# Altium PCB PCB_BanTay_v1-copy_2025-10-16.pcbdoc (part 1 of 2)
Units mm, origin at the board's own origin, x right, y up, seen from the top; angles counter-clockwise.
Board outline 154.82 x 105.03 mm, 2 copper layers (Top Layer, Bottom Layer); 136 components, 142 nets, 546 pads, 572 vias.
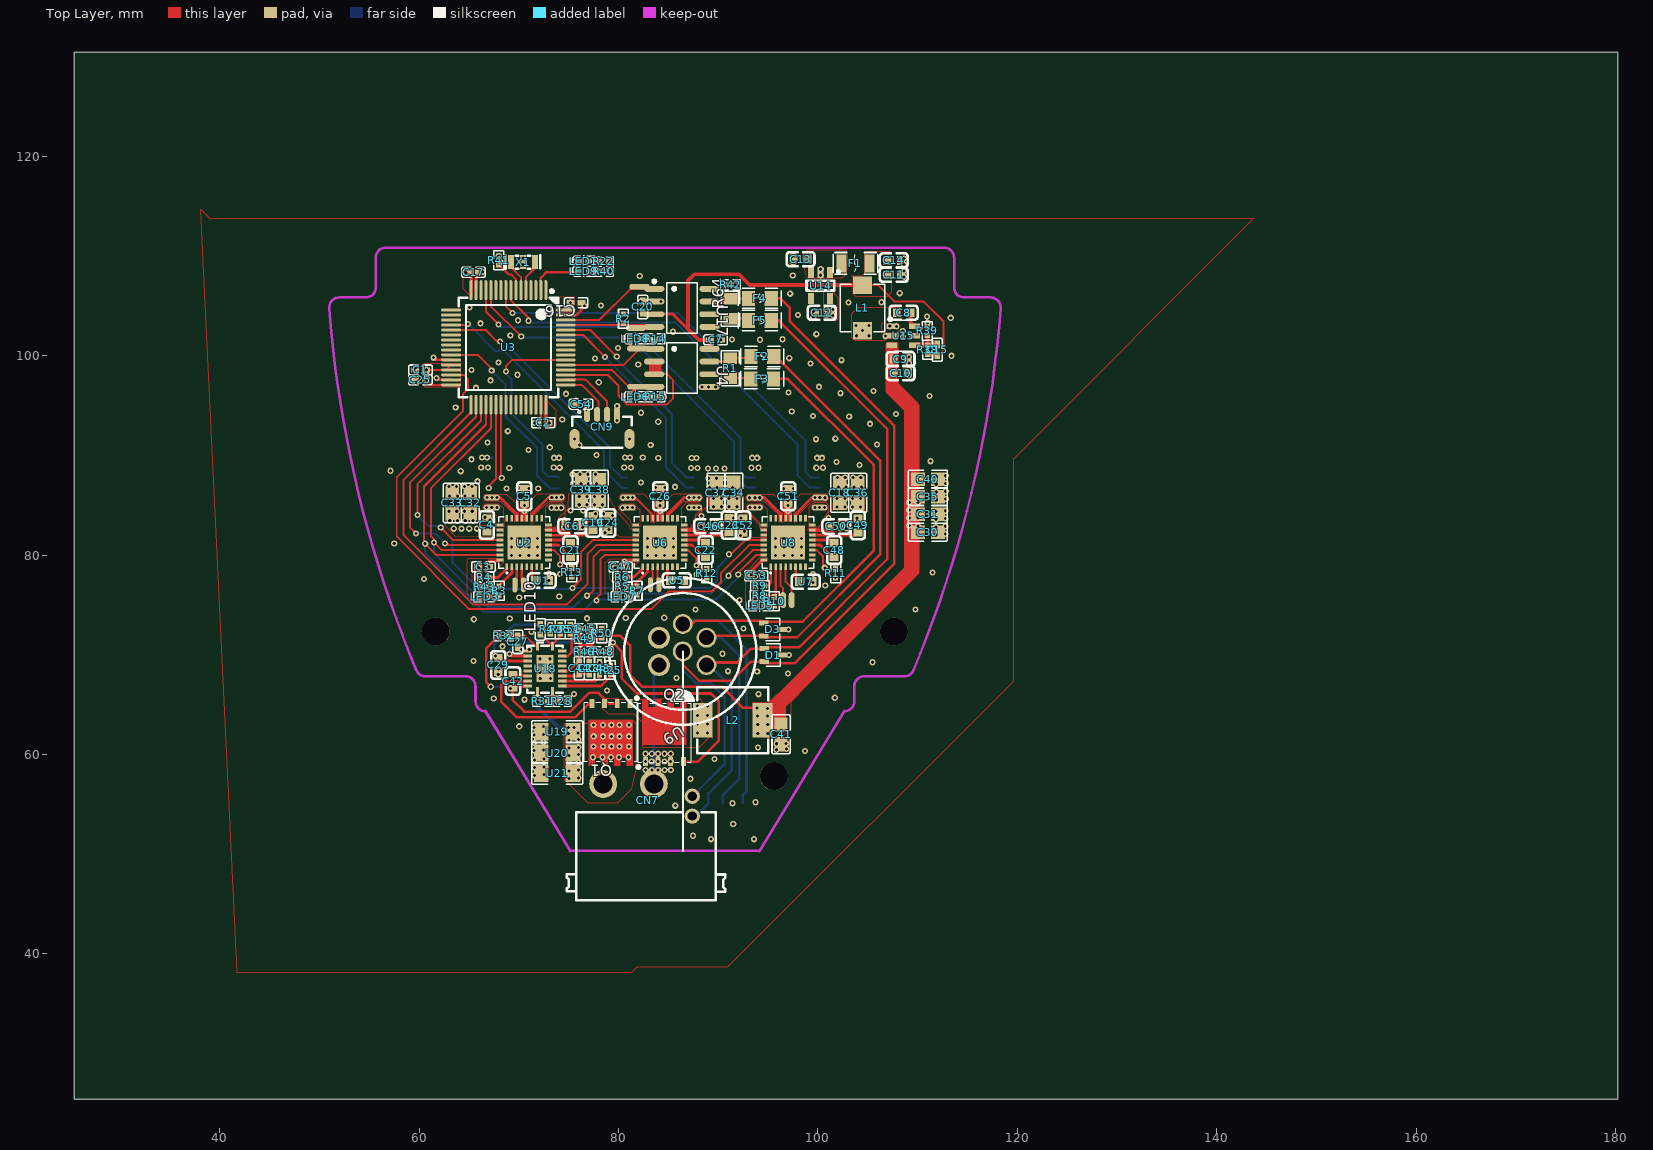
[diagram p0: Top Layer view]
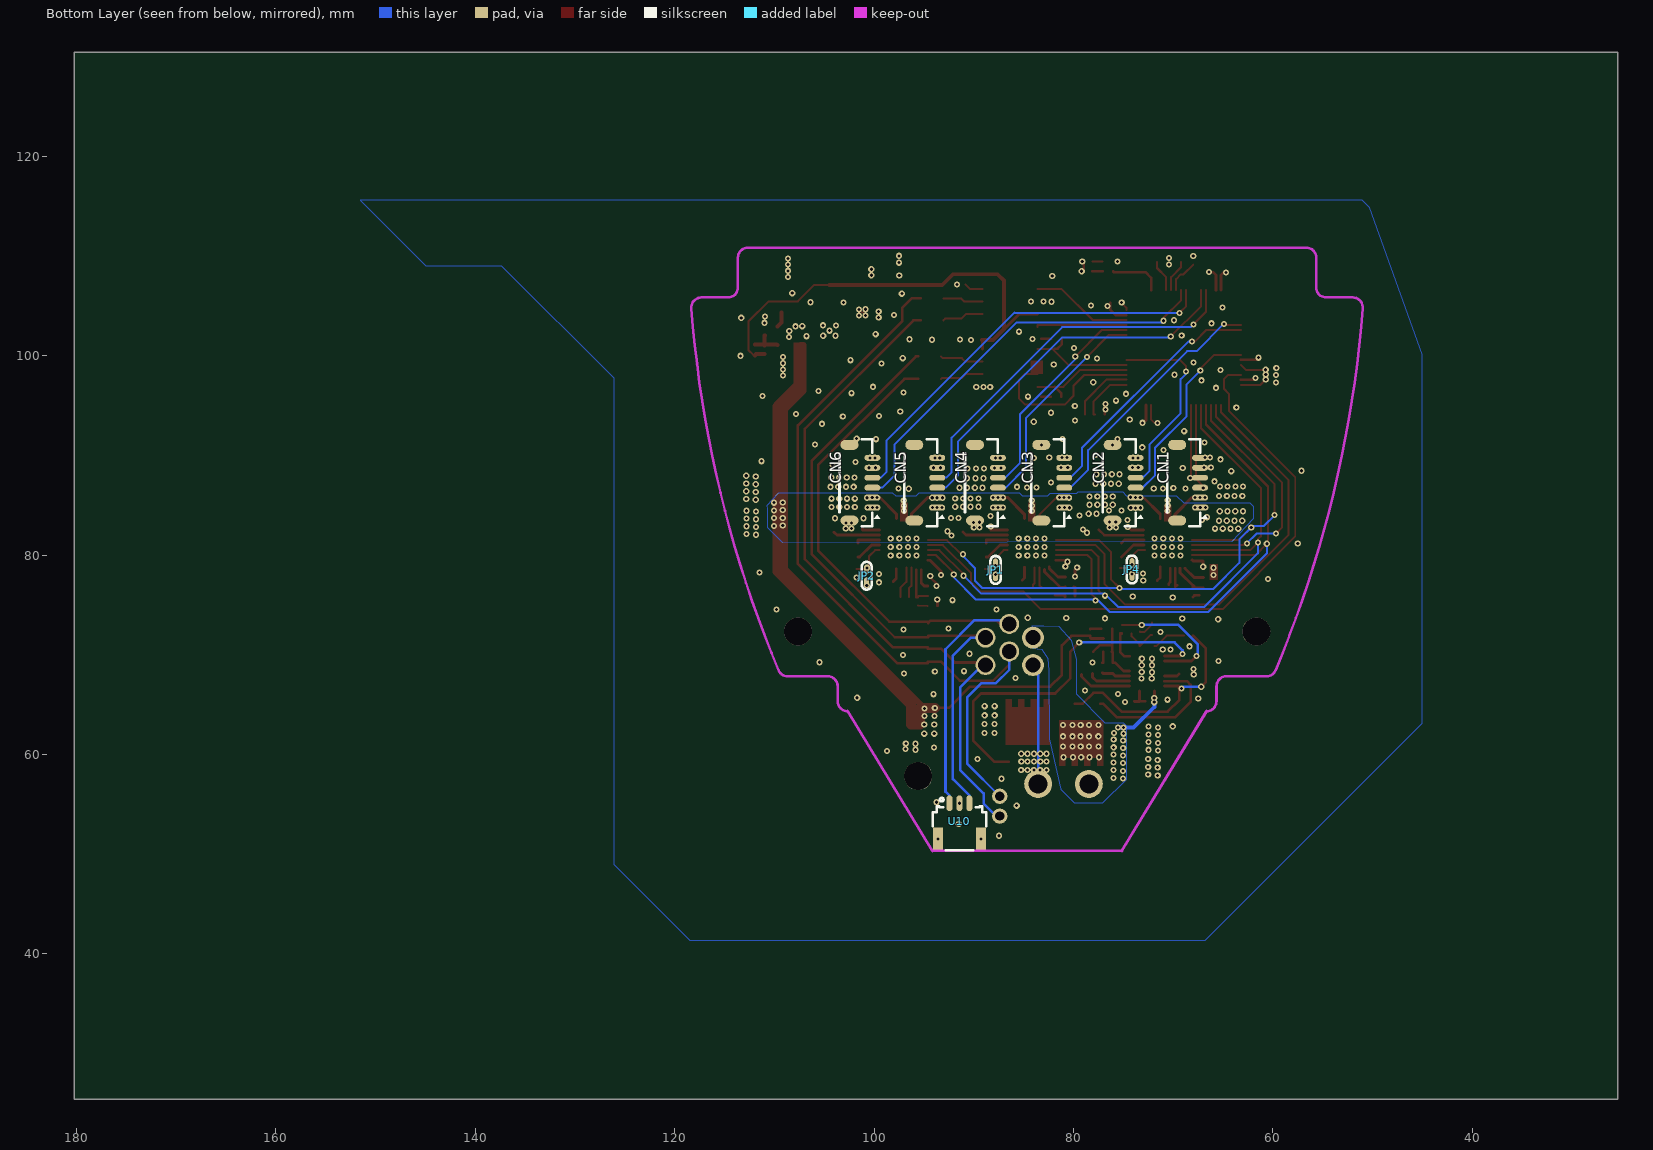
[diagram p1: Bottom Layer view, seen from below]

## Layer stack, top to bottom
Top Layer: signal copper (thickness not stored)
Dielectric: dielectric 0.32, FR-4, Dk 4.8
Bottom Layer: signal copper (thickness not stored)

## Board outline
180.218,25.4 25.4,25.4 25.4,130.43 180.218,130.43

## Components (designator, comment, footprint, x,y, rotation, side; value= is the part's Value field where it differs from the comment)
C1 "100nF" C0402 60.13,98.56 r0 top
C2 "100nF" C0402 72.44,93.28 r0 top
C3 "100nF" C0402 66.44,78.82 r0 top
C4 "220nF" C0603#1 66.78,83.02 r270 top
C5 "220nF" C0603#2 70.54,85.9 r90 top
C6 "220nF" C0603#2 75.35,82.9 r180 top
C7 "100nF" C0402 89.73,101.57 r0 top
C8 "100nF" C0603#2 108.6,104.3 r180 top
C9 "10uF" C0603#2 108.29,99.65 r180 top
C10 "100nF" C0603#2 108.29,98.25 r180 top
C11 "10uF" C0603#2 107.6,108.11 r180 top
C12 "1uF" C0603#2 100.38,104.3 r0 top
C13 "1uF" C0603#2 98.26,109.67 r0 top
C14 "10uF" C0603#2 107.6,109.55 r180 top
C15 "75pF" C0402 111.95,100.58 r270 top
C16 "100nF" C0402 75.74,105.3 r180 top
C17 "100nF" C0402 65.45,108.37 r180 top
C18 "10uF" C0805 102.194,86.23 r270 top
C19 "1uF" C0603#2 77.44,83.23 r90 top
C20 "100nF" C0402 82.41,104.88 r90 top
C21 "22nF" C0603#2 75.18,80.5 r270 top
C22 "22nF" C0603#2 88.74,80.5 r270 top
C23 "1uF" C0603#2 91.07,83 r90 top
C24 "220nF" C0603#2 78.95,83.22 r90 top
C25 "1uF" C0402 60.12,97.58 r0 top
C26 "220nF" C0603#2 84.17,85.9 r90 top
C27 "12pF" C0402 69.9,71.29 r270 top
C28 "3.9nF" C0402 77.07,68.64 r90 top
C29 "2.2uF" C0603#2 67.93,68.97 r90 top
C30 "10uF" C0805 111.02,82.291 r180 top
C31 "10uF" C0805 111.02,84.067 r180 top
C32 "10uF" C0805 65.1,85.22 r270 top
C33 "10uF" C0805 63.324,85.22 r270 top
C34 "10uF" C0805 91.56,86.26 r270 top
C35 "10uF" C0805 111.02,85.844 r180 top
C36 "10uF" C0805 103.97,86.23 r270 top
C37 "10uF" C0805 89.784,86.26 r270 top
C38 "10uF" C0805 78.056,86.54 r270 top
C39 "10uF" C0805 76.28,86.54 r270 top
C40 "10uF" C0805 111.02,87.62 r180 top
C41 "47uF" C0805 96.29,62.02 r90 top
C42 "100nF" C0603#3 69.41,67.36 r90 top
C43 "1uF" C0402 78.09,68.65 r90 top
C44 "330pF" C0402 76.06,68.66 r90 top
C45 "470pF" C0402 76.66,72.6 r0 top
C46 "220nF" C0603#2 88.99,82.87 r180 top
C47 "100nF" C0402 80.21,78.8 r0 top
C48 "22nF" C0603#2 101.62,80.49 r270 top
C49 "1uF" C0603#2 104,82.98 r90 top
C50 "220nF" C0603#2 101.84,82.86 r180 top
C51 "220nF" C0603#2 97.008,85.9 r90 top
C52 "220nF" C0603#2 92.48,82.98 r90 top
C53 "100nF" C0402 93.81,77.91 r180 top
C54 "100nF" C0402 76.24,95.14 r0 top
CN1 "XY-SH1.0-6A51" CONN-SMD_6P-P1.00_XY-SH1.0-6A51 68.443,87.25 r270 bottom
CN2 "XY-SH1.0-6A51" CONN-SMD_6P-P1.00_XY-SH1.0-6A51 74.92,87.25 r270 bottom
CN3 "XY-SH1.0-6A51" CONN-SMD_6P-P1.00_XY-SH1.0-6A51 82.067,87.25 r270 bottom
CN4 "XY-SH1.0-6A51" CONN-SMD_6P-P1.00_XY-SH1.0-6A51 88.72,87.25 r270 bottom
CN5 "XY-SH1.0-6A51" CONN-SMD_6P-P1.00_XY-SH1.0-6A51 94.81,87.25 r270 bottom
CN6 "XY-SH1.0-6A51" CONN-SMD_6P-P1.00_XY-SH1.0-6A51 101.31,87.25 r270 bottom
CN7 "XT30PW(2+2)-M艾迈斯,颜色:黑色,90°焊板,弯针" CONN-TH_4P-XT30PW-M 82.92,55.42 r0 top
CN9 "1.0-4P LT" CONN-SMD_4P-P1.00_SHOU-HAN_1.0-4P-LT 78.34,92.87 r0 top
D1 "TPD2E007DCKR" SOT-323-3_L2.0-W1.3-P1.30-LS2.1-BR 95.5,69.96 r180 top
D3 "TPD2E007DCKR" SOT-323-3_L2.0-W1.3-P1.30-LS2.1-BR 95.47,72.53 r180 top
F1 "1206L016/48NR" FUSE-SMD_1206L016-48NR 103.75,109.25 r180 top
F2 "PPTCSMD0805-200/122A12V" F0805 94.43,99.92 r0 top
F3 "PPTCSMD0805-200/122A12V" F0805 94.4,97.67 r0 top
F4 "PPTCSMD0805-200/122A12V" F0805 94.18,105.75 r0 top
F5 "PPTCSMD0805-200/122A12V" F0805 94.18,103.53 r0 top
JP1 "SB" "SOLDER BRIDGE FOOTPRINT" 87.81,78.51 r90 bottom
JP2 "SB" "SOLDER BRIDGE FOOTPRINT" 100.74,77.92 r90 bottom
JP4 "SB" "SOLDER BRIDGE FOOTPRINT" 74.13,78.55 r90 bottom
L1 "10uH" IND-SMD_L4.5-W4.5_SMMS0420 104.46,104.78 r270 top
L2 "4.7uH" IND-SMD_L7.1-W6.6_SL0650 91.44,63.43 r0 top
LED1 "TZ-P2-0402RTIA1-0.45T" LED0402-RD_RED 76.51,109.48 r0 top
LED3 "TZ-P2-0402RTIA1-0.45T" LED0402-RD_RED 66.56,75.82 r180 top
LED5 "TZ-P2-0402RTIA1-0.45T" LED0402-RD_RED 94.15,74.91 r180 top
LED6 "TZ-P2-0402YGTIA1-0.45T" LED0402-RD_GREEN 81.69,95.87 r0 top
LED7 "TZ-P2-0402RTIA1-0.45T" LED0402-RD_RED 80.33,75.82 r180 top
LED8 "TZ-P2-0402 0TIA1-0.45T" LED0402-RD_ORANGE 81.69,101.68 r0 top
LED9 "SZYY0402B" LED0402-RD_BLUE 76.5,108.47 r0 top
LED10 "TZ-P2-0402RTIA1-0.45T" LED0402-RD_RED 72.14,72.54 r90 top
Q1 "BSC070N10NS5(ES)" TDSON-8_L5.9-W5.2-P1.27-BL-1 79.23,63.33 r180 top
Q2 "BSC070N10NS5(ES)" TDSON-8_L5.9-W5.2-P1.27-BL-1 84.59,61.06 r0 top
R1 "120Ω" R0805 91.19,98.74 r90 top
R2 "10kΩ" R0402 80.49,103.71 r270 top
R3 "1kΩ" R0402 68.01,76.43 r90 top
R4 "12kΩ" R0402 66.52,77.75 r0 top
R5 "10kΩ" R0402 80.39,76.81 r180 top
R6 "12kΩ" R0402 80.37,77.79 r0 top
R7 "1kΩ" R0402 81.85,76.43 r90 top
R8 "10kΩ" R0402 94.16,75.9 r180 top
R9 "12kΩ" R0402 94.18,76.9 r0 top
R10 "1kΩ" R0402 95.61,75.36 r90 top
R11 "10kΩ" R0402 101.76,78.17 r270 top
R12 "10kΩ" R0402 88.85,78.17 r270 top
R13 "10kΩ" R0402 75.31,78.26 r270 top
R14 "1kΩ" R0402 83.67,101.67 r0 top
R15 "1kΩ" R0402 83.67,95.87 r0 top
R22 "1kΩ" R0402 78.52,109.44 r180 top
R25 "33kΩ" R0402 79.19,68.46 r270 top
R28 "12.4kΩ" R0402 74.32,65.31 r180 top
R31 "49.9kΩ" R0402 72.35,65.31 r180 top
R32 "392Ω" R0402 68.48,71.92 r180 top
R35 "20kΩ" R0402 74.15,72.55 r90 top
R38 "100kΩ" R0402 110.99,100.58 r270 top
R39 "13.7kΩ" R0402 110.95,102.47 r270 top
R40 "1kΩ" R0402 78.52,108.45 r0 top
R41 "10kΩ" R0402 67.98,109.55 r90 top
R42 "4.7kΩ" R0402 91.24,107.12 r180 top
R43 "10kΩ" R0402 66.55,76.81 r180 top
R46 "3.57kΩ" R0402 76.57,70.3 r0 top
R47 "2.2kΩ" R0402 73.15,72.56 r270 top
R48 "3.09kΩ" R0402 78.45,70.3 r180 top
R49 "24kΩ" R0402 76.54,71.63 r0 top
R50 "47.5Ω" R0402 78.31,72.15 r270 top
R51 "1kΩ" R0402 75.15,72.56 r270 top
R64 "120Ω" R0805 91.23,104.71 r90 top
U1 "2.2uF" C0603#2 72.3,77.441 r0 top
U2 "MAX22216ATJY+_C20416745" QFN-32_L5.0-W5.0-P0.50-TL-EP3.4 70.54,81.25 r90 top
U3 "STM32G474RET6" LQFP-64_L10.0-W10.0-P0.50-LS12.0-BL 68.95,100.82 r180 top
U4 "MAX485CSA+T" SOIC-8_L4.9-W3.9-P1.27-LS6.0-BL 86.35,98.77 r270 top
U5 "2.2uF" C0603#2 85.84,77.46 r0 top
U6 "MAX22216ATJY+_C20416745" QFN-32_L5.0-W5.0-P0.50-TL-EP3.4 84.17,81.25 r90 top
U7 "2.2uF" C0603#2 98.77,77.33 r0 top
U8 "MAX22216ATJY+_C20416745" QFN-32_L5.0-W5.0-P0.50-TL-EP3.4 97.008,81.25 r90 top
U9 "KH-GX12-6P" CONN-TH_GX12-6P 86.436,71.021 r180 top
U10 "HX 1.0-3P WTDK" CONN-SMD_3P-P1.00_HANXIA_HX-1.0-3P-WTDK 91.43,53.3 r0 bottom
U14 "AP2112K-3.3TRG1" SOT-25-5_L2.9-W1.6-P0.95-LS2.8-BL 100.26,107.03 r180 top
U15 "TPS54302DDCR" SOT-23-6_L2.9-W1.6-P0.95-LS2.8-BL 108.54,101.99 r270 top
U17 "TJA1051T/1J" SOIC-8_L4.9-W3.9-P1.27-LS6.0-BL 86.35,104.79 r270 top
U18 "LM5146RGYR" VQFN-20_L4.5-W3.5-P0.50-BL-EP 72.62,68.61 r90 top
U19 "4.7uF" C1206 73.84,62.27 r0 top
U20 "4.7uF" C1206 73.84,60.14 r0 top
U21 "4.7uF" C1206 73.84,58.09 r0 top
X1 "8MHz" OSC-SMD_3P-L3.2-W1.3-P1.20-L 70.42,109.38 r0 top

## Footprints (in the part's own frame and the unit in brackets; to place one, negate y for a bottom-side part, rotate by r counter-clockwise, add the part's x,y. Pads: shape width x height; smd on the part's side, far side on the other; paste and mask are expansions set on the pad)
C0402 [mm]
  rect 0.79x0.54 smd paste-100 mask+0.051: 1(-0.545,0) 2(0.545,0)
  silkscreen extent -1.17,-0.5 1.17,0.5
C0603#1 [mm]
  rect 0.7x0.9 smd paste+0 mask+0.051: 1(-0.7,0) 2(0.7,0)
  silkscreen extent -1.39,-0.71 1.39,0.71
C0603#2 [mm]
  rect 0.8x0.9 smd paste+0 mask+0.051: 1(-0.7,0) 2(0.7,0)
  silkscreen extent -1.39,-0.71 1.39,0.71
C0603#3 [mm]
  rect 0.65x0.9 smd paste+0 mask+0.051: 1(-0.7,0) 2(0.7,0)
  silkscreen extent -1.39,-0.71 1.39,0.71
C0805 [mm]
  rect 1.41x1.35 smd paste-100 mask+0.051: 1(-1,0) 2(1,0)
  silkscreen extent -1.96,-0.9 1.96,0.9
C1206 [mm]
  rect 1.485x1.728 smd paste-100 mask+0.051: 1(-1.593,0) 2(1.593,0)
  silkscreen extent -2.56,-1.09 2.56,1.09
CONN-SMD_3P-P1.00_HANXIA_HX-1.0-3P-WTDK [mm]
  oval 0.6x1.6 smd paste+0 mask+0.051: 1(1,-1.8) 2(0,-1.8) 3(-1,-1.8)
  rect 1x2.3 smd paste+0 mask+0.051: 4(-2.15,1.8) 5(2.15,1.8)
  silkscreen extent -2.67,-2.34 2.67,2.92
CONN-SMD_4P-P1.00_SHOU-HAN_1.0-4P-LT [mm]
  oval 0.6x1.5 smd paste+0 mask+0.05: 1(-1.5,1.225) 2(-0.5,1.225) 3(0.5,1.225) 4(1.5,1.225)
  oval 1x2 smd paste+0 mask+0.05: 5(2.75,-1.225) 6(-2.75,-1.225)
  silkscreen extent -3,-2.12 3,1.62
CONN-SMD_6P-P1.00_XY-SH1.0-6A51 [mm]
  oval 0.6x1.6 smd paste+0 mask+0.05: 1(2.5,1.15) 2(1.5,1.15) 3(0.5,1.15) 4(-0.5,1.15) 5(-1.5,1.15) 6(-2.5,1.15)
  oval 1x1.8 smd paste+0 mask+0.05: 7(-3.8,-1.15) 8(3.8,-1.15)
  silkscreen extent -4.35,-2.15 4.35,1.91
CONN-TH_4P-XT30PW-M [mil]
  round 110.24 hole 74.8 paste+0 mask+1.97: 1(-175.78,63.59) 2(24.21,63.59)
  round 60 hole 36 paste+0 mask+1.97: 3(175.79,15.16) 4(175.79,-63.58)
  silkscreen extent -319,-395 305,-49
CONN-TH_GX12-6P [mm]
  round 2.2 hole 1.5 paste+0 mask+0.05: 1(2.382,2.063) 2(2.381,-0.687)
  round 2 hole 1.5 paste+0 mask+0.05: 3(0,-2.062) 4(-2.382,-0.687) 5(-2.382,2.062) 6(0,0.688)
  silkscreen extent -7.37,-6.67 7.37,8.05
F0805 [mm]
  rect 1.335x1.5 smd paste-100 mask+0.051: 1(-1.142,0) 2(1.142,0)
  silkscreen extent -2.16,-1.02 2.16,1.02
FUSE-SMD_1206L016-48NR [mm]
  rect 1x1.8 smd paste+0 mask+0.051: 1(-1.4,0) 2(1.4,0)
  silkscreen extent -2.22,-1.09 2.21,1.09
IND-SMD_L4.5-W4.5_SMMS0420 [mm]
  rect 1.724x1.92 smd paste+0 mask+0.051: 1(2.278,0) 2(-2.278,0)
  silkscreen extent -2.38,-2.23 2.38,2.23
IND-SMD_L7.1-W6.6_SL0650 [mm]
  rect 2x3.5 smd paste+0 mask+0.051: 1(-3,0) 2(2.999,0)
  silkscreen extent -3.55,-3.3 3.55,3.3
LED0402-RD_BLUE [mm]
  rect 0.636x0.54 smd paste-100 mask+0.051: 1(-0.538,0) 2(0.538,0)
  silkscreen extent -1.39,-0.54 1.09,0.54
LED0402-RD_GREEN [mm]
  rect 0.636x0.54 smd paste-100 mask+0.051: 1(-0.538,0) 2(0.538,0)
  silkscreen extent -1.39,-0.54 1.09,0.54
LED0402-RD_ORANGE [mm]
  rect 0.636x0.54 smd paste-100 mask+0.051: 1(-0.538,0) 2(0.538,0)
  silkscreen extent -1.39,-0.54 1.09,0.54
LED0402-RD_RED [mm]
  rect 0.636x0.54 smd paste-100 mask+0.051: 1(-0.508,0) 2(0.508,0)
  silkscreen extent -1.39,-0.54 1.09,0.54
LQFP-64_L10.0-W10.0-P0.50-LS12.0-BL [mm]
  oval 0.3x2 smd paste+0 mask+0.051: 1(-3.75,-5.75) 2(-3.25,-5.75) 3(-2.75,-5.75) 4(-2.25,-5.75) 5(-1.75,-5.75) 6(-1.25,-5.75) 7(-0.75,-5.75) 8(-0.25,-5.75) 9(0.25,-5.75) 10(0.75,-5.75) 11(1.25,-5.75) 12(1.75,-5.75) 13(2.25,-5.75) 14(2.75,-5.75) 15(3.25,-5.75) 16(3.75,-5.75) 33(3.75,5.75) 34(3.25,5.75) 35(2.75,5.75) 36(2.25,5.75) 37(1.75,5.75) 38(1.25,5.75) 39(0.75,5.75) 40(0.25,5.75) 41(-0.25,5.75) 42(-0.75,5.75) 43(-1.25,5.75) 44(-1.75,5.75) 45(-2.25,5.75) 46(-2.75,5.75) 47(-3.25,5.75) 48(-3.75,5.75)
  oval 2x0.3 smd paste+0 mask+0.051: 17(5.75,-3.75) 18(5.75,-3.25) 19(5.75,-2.75) 20(5.75,-2.25) 21(5.75,-1.75) 22(5.75,-1.25) 23(5.75,-0.75) 24(5.75,-0.25) 25(5.75,0.25) 26(5.75,0.75) 27(5.75,1.25) 28(5.75,1.75) 29(5.75,2.25) 30(5.75,2.75) 31(5.75,3.25) 32(5.75,3.75) 49(-5.75,3.75) 50(-5.75,3.25) 51(-5.75,2.75) 52(-5.75,2.25) 53(-5.75,1.75) 54(-5.75,1.25) 55(-5.75,0.75) 56(-5.75,0.25) 57(-5.75,-0.25) 58(-5.75,-0.75) 59(-5.75,-1.25) 60(-5.75,-1.75) 61(-5.75,-2.25) 62(-5.75,-2.75) 63(-5.75,-3.25) 64(-5.75,-3.75)
  silkscreen extent -5,-5.79 5,5
OSC-SMD_3P-L3.2-W1.3-P1.20-L [mm]
  rect 0.6x1.4 smd paste+0 mask+0.051: 1(-1.199,0) 2(0,0) 3(1.199,0)
  silkscreen extent -2.28,-0.65 1.72,0.66
QFN-32_L5.0-W5.0-P0.50-TL-EP3.4 [mm]
  rect 0.665x0.28 smd paste-100 mask+0.051: 1(-2.432,1.75) 2(-2.432,1.25) 3(-2.432,0.75) 4(-2.432,0.25) 5(-2.432,-0.25) 6(-2.432,-0.75) 7(-2.432,-1.25) 8(-2.432,-1.75) 17(2.432,-1.75) 18(2.432,-1.25) 19(2.432,-0.75) 20(2.432,-0.25) 21(2.432,0.25) 22(2.432,0.75) 23(2.432,1.25) 24(2.432,1.75)
  rect 0.28x0.665 smd paste-100 mask+0.051: 9(-1.75,-2.432) 10(-1.25,-2.432) 11(-0.75,-2.432) 12(-0.25,-2.432) 13(0.25,-2.432) 14(0.75,-2.432) 15(1.25,-2.432) 16(1.75,-2.432) 25(1.75,2.432) 26(1.25,2.432) 27(0.75,2.432) 28(0.25,2.432) 29(-0.25,2.432) 30(-0.75,2.432) 31(-1.25,2.432) 32(-1.75,2.432)
  rect 3.4x3.4 smd paste-100 mask+0.051: 33(0,0)
  silkscreen extent -3.11,-2.58 2.58,2.58
R0402 [mm]
  rect 0.566x0.54 smd paste-100 mask+0.051: 1(-0.433,0) 2(0.433,0)
  silkscreen extent -0.94,-0.5 0.94,0.5
R0805 [mm]
  rect 1.133x1.377 smd paste-100 mask+0.051: 1(-1,0) 2(1,0)
  silkscreen extent -1.76,-0.92 1.76,0.92
SOIC-8_L4.9-W3.9-P1.27-LS6.0-BL [mm]
  oval 0.588x2.045 smd paste+0 mask+0.051: 1(-1.905,-2.773) 2(-0.635,-2.773) 3(0.635,-2.773) 4(1.905,-2.773) 5(1.905,2.773) 6(0.635,2.773) 7(-0.635,2.773) 8(-1.905,2.773)
  silkscreen extent -2.8,-2.92 2.53,1.52
"SOLDER BRIDGE FOOTPRINT" [mm]
  oval 1x0.5 smd paste+0 mask+0.051: 1(0.635,0) 2(-0.635,0)
  silkscreen extent -1.4,-0.51 1.4,0.51
SOT-23-6_L2.9-W1.6-P0.95-LS2.8-BL [mm]
  rect 0.532x1.072 smd paste+0 mask+0.051: 1(-0.95,-1.149) 2(0,-1.149) 3(0.95,-1.149) 4(0.95,1.149) 5(0,1.149) 6(-0.95,1.149)
  silkscreen extent -1.82,-1.45 1.54,0.89
SOT-25-5_L2.9-W1.6-P0.95-LS2.8-BL [mil]
  rect 24.5x43.5 smd paste+0 mask+2: 1(-37.39,-51.18) 2(-0.03,-51.18) 3(37.39,-51.18) 4(37.39,51.18) 5(-37.39,51.18)
  silkscreen extent -75,-60 56,20
SOT-323-3_L2.0-W1.3-P1.30-LS2.1-BR [mm]
  rect 0.936x0.5 smd paste+0 mask+0.051: 1(0.898,-0.65) 2(0.898,0.65) 3(-0.898,0)
  silkscreen extent -0.7,-1.13 0.7,1.13
TDSON-8_L5.9-W5.2-P1.27-BL-1 [mm]
  rect 0.5x0.9 smd paste-100 mask+0.05: 1(-1.905,-1.775) 2(-0.635,-1.775) 3(0.635,-1.775) 4(1.905,-1.775)
  Top Layer region: -2.205,-0.1 2.205,-0.1 2.205,4.45 1.605,4.45 1.605,3.65 0.935,3.65 0.935,4.45 0.335,4.45 0.335,3.65 -0.335,3.65 -0.335,4.45 -0.935,4.45 -0.935,3.65 -1.605,3.65 -1.605,4.45 -2.205,4.45
  silkscreen extent -2.75,-2.46 2.66,4.06
VQFN-20_L4.5-W3.5-P0.50-BL-EP [mm]
  rect 0.85x0.28 smd paste+0 mask+0.051: 1(-2.25,-0.752) 10(2.25,-0.752) 11(2.25,0.748) 20(-2.25,0.75)
  rect 0.28x0.85 smd paste+0 mask+0.051: 2(-1.749,-1.75) 3(-1.248,-1.75) 4(-0.749,-1.75) 5(-0.248,-1.75) 6(0.251,-1.75) 7(0.752,-1.75) 8(1.251,-1.75) 9(1.752,-1.75) 12(1.752,1.75) 13(1.251,1.75) 14(0.75,1.748) 15(0.25,1.748) 16(-0.25,1.748) 17(-0.75,1.748) 18(-1.25,1.748) 19(-1.75,1.748)
  rect 2.7x1.7 smd paste+0 mask+0.051: 21(0,-0.002)
  silkscreen extent -3.05,-1.78 2.29,1.78

## Free pads (board coordinates)
  oval 1.6x0.6 smd paste+0 mask+0.05: 1(67.29,84.75) 1(73.76,85.76) 1(80.92,84.75) 1(87.58,84.75) 1(93.662,84.75) 1(100.16,84.75) 2(67.29,85.75) 2(73.761,84.75) 2(80.93,85.76) 2(87.56,85.75) 2(93.65,85.75) 2(100.19,85.75)
  oval 2.045x0.588 smd paste+0 mask+0.051: 1(81.87,100.71) 1(81.89,96.88) 1(82.1,106.91) 4(81.75,102.77)
  oval 0.5x1.5 smd paste+0 mask+0.05: 3(70.46,77.01) 4(69.6,76.99) 6(84.04,77.01) 7(83.19,77.01)
  oval 0.6x1.6 smd paste+0 mask+0.05: 8(96.5,75.48) 9(97.36,75.48)
  round 2.8 hole 2.8 unplated paste+0: ""(61.65,72.33) ""(95.57,57.82) ""(107.63,72.33)

## Via types
v1: diameter 0.62, hole 0.31, Top Layer to Bottom Layer, tented both sides, 572 vias

## Nets (pads, with @x,y where several pads share a name; then routed paths per layer and width w, separated by ;. In a path a pad name is that pad's centre, name@x,y a point inside that pad or via, vN(x,y) a via of type N, cw(c..) or ccw(c..) an arc to the next point about the centre after c; other vN are vias at no path point)
+3.3V: C1.2 C2.2 C3.2 C12.2 C16.2 C17.2 C25.2 C47.2 C53.2 C54.2 CN1.6 CN2.6 CN3.6 CN4.6 CN5.6 CN6.6 CN9.1 JP1.2 JP2.2 JP4.2 LED3.2 LED5.2 LED7.2 R5.2 R8.2 R14.2 R15.2 R22.1 R40.2 R41.2 R43.2 U2.32 U3.16 U3.28 U3.29 U3.32 U3.48 U3.64 U6.32 U8.32 U14.5 | length 23.3
  Top Layer w0.2: C1.2@60.675,98.56 60.675,97.631 v1(60.705,97.601) 61.236,97.07 U3.32@63.2,97.07 ; v1@60.82,98.07 60.715,98.175 v1(60.715,98.579) 62.709,98.579 U3.28@63.2,99.07 ; U3.64@74.7,104.57 74.7,104.805 C16.2@75.195,105.3 ; C12.2@101.08,104.3 101.18,104.3 v1(101.51,104.63)
  Top Layer w0.254: v1(76.785,95.14) 76.84,95.085 CN9.1@76.84,94.095 ; R40.2@78.953,108.45 R22.1@78.953,109.44
  Top Layer w0.28: R5.2@79.806,76.739 79.887,76.739 R5.2@79.957,76.81 79.832,76.685 LED7.2@79.832,75.9 ; C47.2@80.81,78.841 80.81,79.11 80.452,79.468 U6.32@81.747,79.468 ; v1(93.27,77.99) 93.269,78.371 94.369,79.471 U8.32@94.605,79.471 ; LED5.2@93.642,74.91 93.642,75.512 v1(93.66,75.53)
  Top Layer w0.3: v1(64.68,108.35) 64.885,108.35 C17.2@64.905,108.37 65.2,108.075 U3.16@65.2,106.57 ; v1(66.985,78.82) 66.985,79.39 67.997,79.39 U2.32@68.128,79.52 ; U3.48@72.7,95.07 72.7,93.565 C2.2@72.985,93.28
  Bottom Layer w0.254: v1(66.3,89.78) 67.262,89.78 CN1.6@67.293,89.75
  other v1: 100.73,76.95 87.81,78.06 74.13,78.08 80.81,78.84 80.59,79.32 73.53,89.75 74.02,89.75 87.34,89.73 87.83,89.73 93.41,89.75 93.9,89.75 99.92,89.75 100.41,89.75 80.64,89.77 81.13,89.77 66.79,89.78 73.085,93.26 76.77,94.61 84.57,95.88 60.71,98.09 84.103,101.67 101.5,104.02 100.86,104.03 100.84,104.65 75.16,105.34 79.17,108.46 79.11,109.44 67.98,109.983
+5V: C7.1 C11.2 C14.2 C15.2 C20.1 F1.1 L1.2 R38.2 U4.8 U17.3 | length 47.7
  Top Layer w0.2: L1.2@104.46,107.058 106.032,107.058 107.638,105.45 110.579,105.45 112.591,103.441 112.591,100.558 112.065,100.034 C15.2@111.95,100.035
  Top Layer w0.3: U17.3@83.579,104.154 85.466,104.154 88.052,101.569 C7.1@89.185,101.57 ; U4.8@89.122,100.675 89.122,101.507 C7.1@89.185,101.57
  Top Layer w0.4: C7.1@89.185,101.57 88.08,101.569 86.97,102.679 86.97,107.53 87.6,108.16 92.07,108.16 93.172,107.058 L1.2@104.46,107.058 ; R38.2@110.99,100.147 111.837,100.147 C15.2@111.95,100.035
A: D3.1 F3.2 U9.3 U10.1 | length 68.1
  Top Layer w0.254: U9.3@86.436,73.083 87.373,73.083 87.72,73.43 94.322,73.43 D3.1@94.572,73.18 ; D3.1@94.572,73.18 94.572,73.329 98.471,73.329 105.601,80.461 105.601,89.021 96.949,97.67 F3.2@95.542,97.67
  Bottom Layer w0.254: U9.3@86.436,73.083 86.812,73.461 89.919,73.461 92.829,70.55 92.829,56.26 92.431,55.859 U10.1@92.43,55.1
B: D3.2 F2.2 U9.4 U10.3 | length 65
  Top Layer w0.254: U9.4@88.818,71.708 88.99,71.88 D3.2@94.572,71.88 ; D3.2@94.572,71.881 94.572,71.749 97.92,71.749 106.261,80.09 106.261,89.45 95.791,99.92 F2.2@95.572,99.92
  Bottom Layer w0.254: U9.4@88.819,71.708 90.292,71.708 92.09,69.91 92.09,57.53 90.429,55.869 U10.3@90.43,55.1
C8_1: C8.1 U15.6 | length 1.5
  Top Layer w0.4: C8.1@109.3,104.3 109.3,103.329 U15.6@109.689,102.94
C22_1: C22.1 U6.13 | length 2.4
  Top Layer w0.28: U6.13@86.602,81.5 88.74,81.5 C22.1@88.74,81.2
C22_2: C22.2 U6.12 | length 2.6
  Top Layer w0.28: U6.12@86.602,81 87.371,81 88.57,79.801 C22.2@88.74,79.801
C23_1: C23.1 U6.14 | length 4.6
  Top Layer w0.28: U6.14@86.602,82 90.77,82 C23.1@91.07,82.3
C27_1: C27.1 R32.1 U18.11 | length 3.4
  Top Layer w0.2: R32.1@68.913,71.92 70.64,71.919 71.699,70.86 U18.11@71.872,70.86
C42_1: C42.1 L2.1 Q1.1 Q1.2 Q1.3 R32.2 U18.19 | length 23
  Top Layer w0.254: v1(67.18,66.79) 66.72,67.25 66.72,70.64 68,71.92 R32.2@68.047,71.92 ; C42.1@69.41,66.66 69.37,66.621 69.37,65.47 70.551,64.289 75.159,64.289 77.048,66.179 77.991,66.179 79.065,65.104 Q1.2@79.865,65.105
  Top Layer w0.28: C42.1@69.41,66.66 69.41,66.86 U18.19@70.872,66.86
  Bottom Layer w0.254: v1(67.18,66.79) 68.97,66.79 v1(69.16,66.6)
  other v1: 87.905,62.14 88.91,62.14 87.905,63.06 88.91,63.06 87.895,63.92 88.9,63.92 87.895,64.84 88.9,64.84
C42_2: C42.2 U18.17 | length 1.5
  Top Layer w0.28: C42.2@69.41,68.06 69.61,67.86 U18.17@70.872,67.86
C43_1: C43.1 U18.3 | length 4.2
  Top Layer w0.28: U18.3@74.371,67.362 77.696,67.362 78.087,67.746 C43.1@78.09,68.105
C44_1: C28.1 C44.1 U18.4 | length 2.8
  Top Layer w0.28: U18.4@74.37,67.861 75.806,67.861 C44.1@76.06,68.115 77.01,68.115 C28.1@77.08,68.185
C45_1: C44.2 C45.1 R46.1 R48.2 R49.1 U18.5 | length 7.7
  Top Layer w0.254: 76.105,70.971 77.346,70.971 R48.2@78.017,70.3
  Top Layer w0.28: U18.5@74.37,68.362 74.971,68.361 75.814,69.204 C44.2@76.06,69.205 ; C44.2@76.06,69.205 76.06,70.223 R46.1@76.137,70.3 76.115,70.3 C45.1@76.115,72.6
C45_2: C45.2 R50.1 | length 1.1
  Top Layer w0.28: C45.2@77.205,72.6 78.293,72.6 R50.1@78.31,72.583
C48_1: C48.1 U8.13 | length 2.5
  Top Layer w0.28: U8.13@99.441,81.5 101.62,81.5 C48.1@101.62,81.19
C48_2: C48.2 U8.12 | length 2.7
  Top Layer w0.28: U8.12@99.441,81 100.23,81 101.439,79.791 C48.2@101.62,79.791
C49_1: C49.1 U8.14 | length 4.7
  Top Layer w0.28: U8.14@99.441,82 103.72,82 C49.1@104,82.28
CANH: CN7.3 D1.2 F4.2 U9.6 | length 79
  Top Layer w0.254: U9.6@86.436,70.333 86.436,69.024 88.069,67.39 91.379,67.39 93.299,69.311 94.602,69.311 94.602,69.14 97.661,69.14 107.63,79.11 107.63,92.991 97.18,103.441 97.18,104.789 96.22,105.749 F4.2@95.322,105.75
  Bottom Layer w0.254: U9.6@86.436,70.333 86.436,68.483 87.798,67.121 89.258,67.121 90.64,65.739 90.64,59.059 CN7.3@87.386,55.805
CANL: CN7.4 D1.1 F5.2 U9.5 | length 70.2
  Top Layer w0.254: U9.5@88.818,68.958 88.819,69.219 91.879,69.219 93.271,70.611 94.602,70.611 94.602,70.731 98.08,70.731 106.949,79.6 106.949,92.641 96.06,103.53 F5.2@95.321,103.53
  Bottom Layer w0.254: CN7.4@87.385,53.805 87.744,53.804 89.009,55.069 89.009,56.1 91.359,58.45 91.359,66.73 89.131,68.958 U9.5@88.818,68.958
CSB1: U2.29 U3.34 | length 24.8
  Top Layer w0.2: v1@59.68,82.161 59.101,82.74 59.101,87.281 65.7,93.88 U3.34@65.7,95.071 ; v1(62.6,81.17) 62.82,81.17 62.99,81 U2.29@68.107,81
  Bottom Layer w0.2: v1(59.68,82.16) 61.61,82.16 v1(62.6,81.17)
DE: U3.51 U4.2 U4.3 | length 16.8
  Top Layer w0.2: U3.51@74.699,98.071 78.89,98.071 80.01,96.951 80.01,95.95 80.879,95.079 84.811,95.079 85.461,95.729 85.461,97.55 84.874,98.135 U4.3@83.579,98.135
DI: LED6.1 pad.1@81.89,96.88 U3.52 U4.4 | length 10.9
  Top Layer w0.2: U3.52@74.699,98.571 79.309,98.571 81.016,96.865 U4.4@83.579,96.865
  Top Layer w0.254: LED6.1@81.202,95.87 81.202,96.191 pad.1@81.89,96.88
DRV1_CRC_EN: JP4.1 R13.1 U2.11 | length 3.7
  Top Layer w0.2: U2.11@72.822,80.499 73.531,80.499 74.11,79.92 74.11,79.08 v1(74.13,79.06) 74.497,78.693 R13.1@75.31,78.693
DRV1_OUT0: CN1.1 pad.1@67.29,84.75 U2.25
  other v1: 66.752,84.76 67.28,84.75 67.802,84.75
DRV1_OUT1: CN1.2 pad.2@67.29,85.75 U2.22 | length 3.1
  Top Layer w0.3: v1(67.81,85.76) 68.12,85.76 69.79,84.09 U2.22@69.79,83.682
  other v1: 66.792,85.76 67.29,85.76
DRV1_OUT2: CN2.2 pad.1@73.76,85.76 U2.19 | length 3.6
  Top Layer w0.3: U2.19@71.29,83.682 71.29,84.09 72.96,85.76 pad.1@73.76,85.76
  other v1: 73.3,85.78 73.789,85.78 74.28,85.79
DRV1_OUT3: CN2.1 pad.2@73.761,84.75 U2.16
  other v1: 73.281,84.74 73.76,84.73 74.251,84.74
DRV2_CRC_EN: JP1.1 R12.1 U6.11 | length 3.5
  Top Layer w0.2: U6.11@86.602,80.5 86.99,80.5 87.81,79.68 v1(87.81,78.96) 88.168,78.602 R12.1@88.85,78.603
DRV2_OUT0: CN3.1 pad.1@80.92,84.75 U6.25
  other v1: 80.41,84.74 80.908,84.75 81.4,84.76
DRV2_OUT1: CN3.2 pad.2@80.93,85.76 U6.22 | length 3.1
  Top Layer w0.2: v1(81.412,85.76) 81.699,85.76 83.419,84.04 U6.22@83.42,83.682
  other v1: 80.432,85.75 80.93,85.76
DRV2_OUT2: CN4.2 pad.2@87.56,85.75 U6.19 | length 3.3
  Top Layer w0.3: U6.19@84.92,83.682 84.92,84.101 86.571,85.75 pad.2@87.069,85.75
  other v1: 87.07,85.75 87.57,85.75 88.05,85.75
DRV2_OUT3: CN4.1 pad.1@87.58,84.75 U6.16
  other v1: 87.06,84.75 87.58,84.75 88.07,84.75
DRV3_CRC_EN: JP2.1 R11.1 U8.11 | length 3.7
  Top Layer w0.2: U8.11@99.441,80.5 99.89,80.5 100.49,79.9 100.49,78.823 100.596,78.717 v1(100.682,78.717) 100.796,78.603 R11.1@101.76,78.603
DRV3_OUT0: CN5.1 pad.1@93.662,84.75 U8.25
  other v1: 93.17,84.75 93.662,84.75 94.15,84.75
DRV3_OUT1: CN5.2 pad.2@93.65,85.75 U8.22 | length 3.7
  Top Layer w0.3: pad.2@93.65,85.75 94.63,85.75 96.258,84.121 U8.22@96.258,83.682
  other v1: 93.14,85.74 93.672,85.74 94.16,85.74
DRV3_OUT2: CN6.2 pad.2@100.19,85.75 U8.19 | length 3.1
  Top Layer w0.3: U8.19@97.758,83.682 97.758,84.118 99.4,85.76 v1(99.7,85.76)
  other v1: 100.18,85.76 100.69,85.74
DRV3_OUT3: CN6.1 pad.1@100.16,84.75 U8.16
  other v1: 99.68,84.76 100.16,84.76 100.64,84.76
F1_2: C13.2 F1.2 U14.1 U14.3
F2_1: F2.1 R1.2 U4.7 | length 4.4
  Top Layer w0.2: U4.7@89.122,99.405 90.855,99.405 R1.2@91.19,99.74 93.108,99.74 F2.1@93.287,99.92
F3_1: F3.1 R1.1 U4.6 | length 4.3
  Top Layer w0.2: U4.6@89.122,98.135 90.795,98.135 R1.1@91.19,97.74 93.187,97.74 F3.1@93.257,97.67
FDCAN_RX: pad.4@81.75,102.77 R2.2 U3.61 U17.4 | length 9.1
  Top Layer w0.2: U3.61@74.7,103.07 83.579,103.07 U17.4@83.579,102.884
FDCAN_TX: pad.1@82.1,106.91 U3.62 U17.1 | length 10.2
  Top Layer w0.2: U3.62@74.7,103.57 78.08,103.57 81.204,106.694 U17.1@83.579,106.694